# Altium PCB mdap3.PcbDoc
Units mil, origin at the board's own origin, x right, y up, seen from the top; angles counter-clockwise.
Board outline 6000 x 4000 mil, 2 copper layers (Top Layer, Bottom Layer); 145 components, 123 nets, 451 pads, 89 vias.
Unrouted connection lines stored in the file: 51.
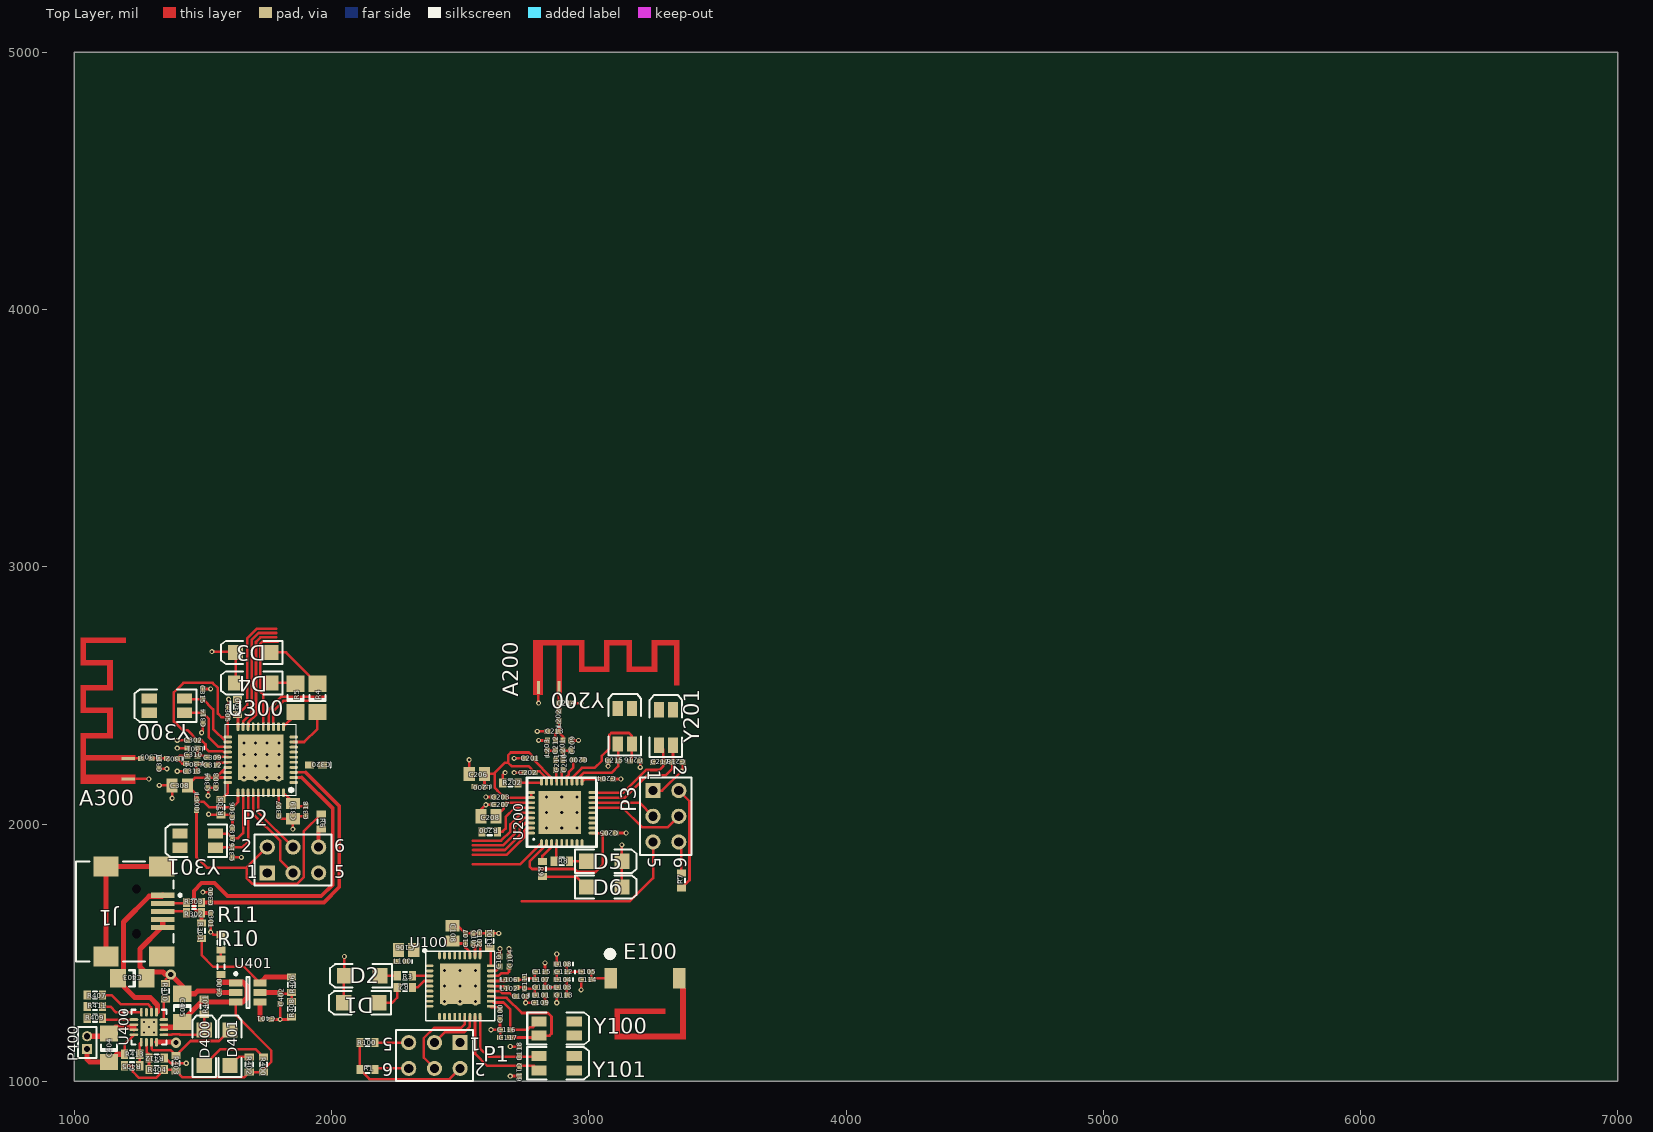
[diagram p0: Top Layer view]
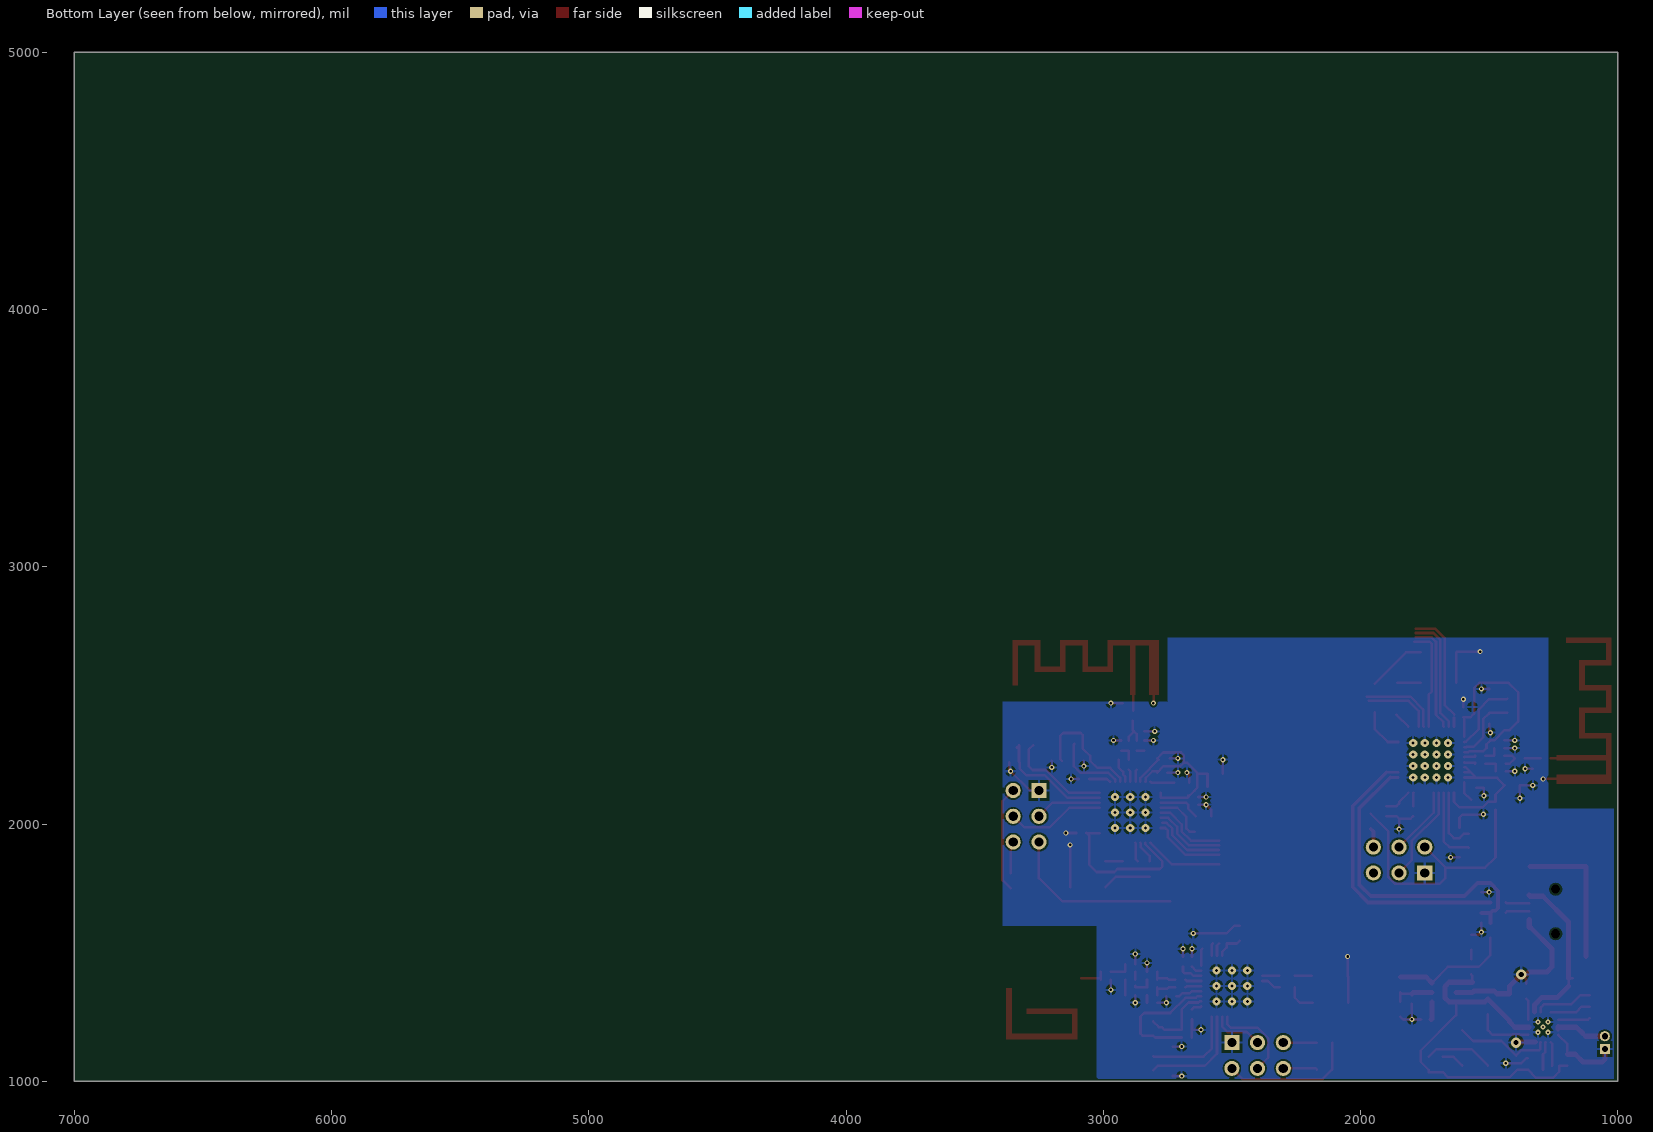
[diagram p1: Bottom Layer view, seen from below]

## Layer stack, top to bottom
Top Solder: solder mask 0.4, Solder Resist, Dk 3.5
Top Layer: signal copper 1.4
Dielectric1: dielectric 12.6, FR-4, Dk 4.8
Bottom Layer: signal copper 1.4
Bottom Solder: solder mask 0.4, Solder Resist, Dk 3.5

## Board outline
1000,1000 7000,1000 7000,5000 1000,5000

## Design rules (kind name [scope] priority, off if disabled: settings)
Clearance [All] p1: gap=7
ComponentClearance [All] p1: gap=0 collisioncheckmode=3 verticalgap=10 showdistances=FALSE
DiffPairsRouting [All] p1: maxlimit=10 minlimit=10 mostfreqgap=10 toplayer_minwidth=10 toplayer_maxwidth=15 toplayer_prefwidth=15 bottomlayer_minwidth=10 bottomlayer_maxwidth=15 bottomlayer_prefwidth=15 maxuncoupledlength=500
PolygonConnect [All] p1: connectstyle=Relief reliefconductorwidth=10 reliefentries=4 polygonreliefangle="90 Angle" airgapwidth=10
RoomDefinition U_cc2510 [InComponentClass('U_cc2510')] p1: confinementstyle=ConfineIn formatcopy=TRUE lockcomponents=FALSE outline 2475,2735 2475,1695 3400,1695 3400,2735
RoomDefinition U_cc1110 [InComponentClass('U_cc1110')] p2: confinementstyle=ConfineIn formatcopy=TRUE lockcomponents=FALSE outline 1945.31,980 3407.68,980 3407.68,1705 1945.31,1705
RoomDefinition U_CC2540 [InComponentClass('U_CC2540')] p3: confinementstyle=ConfineIn formatcopy=TRUE lockcomponents=FALSE outline 1015,1865 2135,1865 2135,2743.78 1015,2743.78
RoomDefinition U_Alim [InComponentClass('U_Alim')] p4: confinementstyle=ConfineIn formatcopy=TRUE lockcomponents=FALSE outline 1005,1865.18 1005,1010 1920.08,1010 1920.08,1865.18
RoomDefinition TOP [InComponentClass('TOP')] p5: confinementstyle=ConfineIn formatcopy=TRUE lockcomponents=FALSE outline 990,1010 3415,1010 3415,2745 990,2745
RoutingVias [All] p1: holewidth=10 width=20 viastyle="Through Hole" minholewidth=7 minwidth=18 maxholewidth=28 maxwidth=50
SolderMaskExpansion [All] p1: expansion=4
UnpouredPolygon [All] p1: allowunpoured=FALSE
Width [All] p1: maxlimit=50 minlimit=10 preferedwidth=10
27 further rules are at their usual default settings.

## Classes and differential pairs
component class U_CC2540: A300 C300 C301 C302 C303 C304 C305 C306 C307 C308 C309 C310 C311 C312 C313 C314 C315 C316 C317 C318 C319 C320 L300 L301 L302 L303 L304 R300 R301 R302 R303 R305 U300 Y300 Y301
component class U_cc2510: A200 C200 C201 C202 C203 C204 C205 C206 C207 C208 C209 C210 C211 C212 C213 C214 C215 C216 C217 C218 L200 L201 L202 L203 R200 R202 U200 Y200 Y201
component class U_cc1110: C100 C101 C102 C103 C104 C105 C106 C107 C108 C109 C110 C111 C112 C113 C114 C115 C116 C117 C118 C119 E100 L100 L101 L102 L103 L104 L105 L106 L107 L108 R100 R101 U100 Y100 Y101
component class U_Alim: C400 C401 C402 C403 C404 C405 D400 D401 P400 R400 R401 R402 R403 R404 R405 R406 R407 R408 R409 R410 R411 R412 R413 U400 U401
component class TOP: D1 D2 D3 D4 D5 D6 J1 P1 P2 P3 R1 R2 R3 R4 R5 R6 R7 R8 R9 R10 R11
differential pair D: +D_P -D_N

## Components (designator, comment, footprint, x,y, rotation, side; value= is the part's Value field where it differs from the comment)
A200 "Antenna_IIFA_1" antenna_IIFA_1 2757.39,2416.2 r270 top
A300 "Antenna_IIFA_1" antenna_IIFA_1 1323.8,2129.17 r0 top
C100 "Cap" 0402#1 2655,1260 r90 top
C101 "Cap" 0402#1 2655,1465 r270 top
C102 "Cap" 0402#1 2575,1555 r270 top
C103 "Cap" 0402#1 2735,1330 r180 top
C104 "Cap" 0402#1 2690,1465 r270 top
C105 "Cap" 0402#1 2550,1555 r270 top
C106 "Cap" C0805 2290,1510 r0 top
C107 "Cap" 0402#1 2520,1555 r90 top
C108 "Cap" C0805 2470,1575 r90 top
C109 "Cap" 0402#1 2810.31,1305 r0 top
C110 "Cap" 0402#1 2810.31,1365 r180 top
C111 "Cap" 0402#1 2750.31,1380 r270 top
C112 "Cap" 0402#1 2895.31,1425 r180 top
C113 "Cap" 0402#1 2895,1335 r0 top
C114 "Cap" 0402#1 2990,1395 r180 top
C115 "Cap" 0402#1 2810.31,1425 r180 top
C116 "Cap" 0402#1 2675,1200 r0 top
C117 "Cap" 0402#1 2675,1170 r0 top
C118 "Cap" 0402#1 2730,1115 r270 top
C119 "Cap" 0402#1 2730,1040 r90 top
C200 "Cap" 0402#1 2960,2250 r180 top
C201 "Cap" 0402#1 2770,2255 r0 top
C202 "Cap" 0402#1 2770,2200 r0 top
C203 "Cap" 0402#1 2650,2105 r0 top
C204 "Cap" 0402#1 3075,2175 r180 top
C205 "Cap" 0402#1 3085,1965 r180 top
C206 "Cap" C0805 2565,2195 r0 top
C207 "Cap" 0402#1 2650,2075 r180 top
C208 "Cap" C0805 2610,2030 r180 top
C209 "Cap" 0402#1 2930,2305 r270 top
C210 "Cap" 0402#1 2900,2230 r270 top
C211 "Cap" 0402#1 2870,2230 r270 top
C212 "Cap" 0402#1 2870,2305 r270 top
C213 "Cap" 0402#1 2860,2360 r0 top
C214 "Cap" 0402#1 2905,2470 r180 top
C215 "Cap" 0402#1 3095,2245 r0 top
C216 "Cap" 0402#1 3180,2245 r180 top
C217 "Cap" 0402#1 3270,2240 r0 top
C218 "Cap" 0402#1 3345,2240 r180 top
C300 "Cap" 0402#1 1530,1715 r90 top
C301 "Cap" 0402#1 1530,1635 r270 top
C302 "Cap" 0402#1 1460,2325 r0 top
C303 "Cap" 0402#1 1550,2160 r90 top
C304 "Cap" 0402#1 1520,2160 r90 top
C305 "Cap" 0402#1 1600,2435 r270 top
C306 "Cap" 0402#1 1615,2045 r90 top
C307 "Cap" 0402#1 1795,2050 r90 top
C308 "Cap" C0805 1410,2150 r0 top
C309 "Cap" 0402#1 1535,2260 r0 top
C310 "Cap" 0402#1 1460,2265 r0 top
C311 "Cap" 0402#1 1330,2235 r90 top
C312 "Cap" 0402#1 1535,2230 r0 top
C313 "Cap" 0402#1 1455,2205 r0 top
C314 "Cap" 0402#1 1500,2410 r90 top
C315 "Cap" 0402#1 1500,2505 r270 top
C316 "Cap" 0402#1 1615,1890 r90 top
C317 "Cap" 0402#1 1615,1965 r270 top
C318 "Cap" 0402#1 1900,2050 r90 top
C319 "Cap" C0805 1850,2050 r90 top
C320 "Cap" 0402#2 1940,2230 r180 top
C400 "Cap" 0402#1 1565,1365 r90 top
C401 "Cap" 0402#1 1745,1240 r180 top
C402 "Cap" 0402#1 1800,1320 r90 top
C403 "Cap" 1206 1225,1400 r180 top
C404 "Cap" 1206 1135,1130 r90 top
C405 "Cap" 1206 1420,1285 r270 top
D1 "LED2" 3.2X1.6X1.1 2116.1,1305 r180 top
D2 "LED2" 3.2X1.6X1.1 2120,1410 r180 top
D3 "LED2" 3.2X1.6X1.1 1696.1,2666.85 r180 top
D4 "LED2" 3.2X1.6X1.1 1696.1,2548.43 r180 top
D5 "LED2" 3.2X1.6X1.1 3060,1855 r0 top
D6 "LED2" 3.2X1.6X1.1 3060,1755 r0 top
D400 "LED2" 3.2X1.6X1.1 1505,1130 r90 top
D401 "LED2" 3.2X1.6X1.1 1605,1130 r90 top
E100 "Antenna Chip" Johanson_0868AT43A0020 3145.31,1470 r0 top
J1 "440247-1" 440247 1035,1660 r180 top
L100 "Inductor" 0402-A 2270,1465 r180 top
L101 "Inductor" 0402-A 2810.31,1335 r0 top
L102 "Inductor" 0402-A 2700,1365 r0 top
L103 "Inductor" 0402-A 2895.31,1365 r0 top
L104 "Inductor" 0402-A 2895.31,1395 r180 top
L105 "Inductor" 0402-A 2990,1425 r0 top
L106 "Inductor" 0402-A 2700,1395 r0 top
L107 "Inductor" 0402-A 2810.31,1395 r0 top
L108 "Inductor" 0402-A 2895,1455 r180 top
L200 "Inductor" 0402-A 2575,2145 r180 top
L201 "Inductor" 0402-A 2900,2305 r90 top
L202 "Inductor" 0402-A 2885,2420 r90 top
L203 "Inductor" 0402-A 2840,2305 r90 top
L300 "Inductor" 0402-A 1475,2075 r270 top
L301 "Inductor" 0402-A 1460,2295 r180 top
L302 "Inductor" 0402-A 1380,2255 r180 top
L303 "Inductor" 0402-A 1280,2255 r180 top
L304 "Inductor" 0402-A 1455,2235 r180 top
P1 "Header 3X2" HDR2X3 2500,1150 r180 top
P2 "Header 3X2" HDR2X3 1750,1810 r0 top
P3 "Header 3X2" HDR2X3 3250,2130 r270 top
P400 "Battery" MHDR1X2 1050,1125 r90 top
R1 "Res3" J1-0603 2140,1045 r0 top
R2 "Res3" J1-0603 2285,1365 r180 top
R3 "Res3" J1-0603 2285,1410 r180 top
R4 "Res3" 1206 1945,2490 r90 top
R5 "Res3" 1206 1860,2490 r90 top
R6 "Res3" J1-0603 1960,2010 r270 top
R7 "Res3" J1-0603 3360,1780 r90 top
R8 "Res3" J1-0603 2895,1855 r0 top
R9 "Res3" J1-0603 2820,1825 r270 top
R10 "Res3" J1-0603 1570,1445 r270 top
R11 "Res3" J1-0603 1570,1540 r270 top
R100 "Res3" J1-0603 2140,1150 r180 top
R101 "Res3" J1-0603 2615,1545 r270 top
R200 "Res3" J1-0603 2615,1970 r180 top
R202 "Res3" J1-0603 2695,2160 r0 top
R300 "Res3" J1-0603 1635,2455 r90 top
R301 "Res3" J1-0603 1495,1585 r270 top
R302 "Res3" J1-0603 1465,1655 r0 top
R303 "Res3" J1-0603 1465,1695 r0 top
R305 "Res3" J1-0603 1570,2065 r90 top
R400 "Res3" J1-0603 1735,1065 r270 top
R401 "Res3" J1-0603 1505,1290 r90 top
R402 "Res3" J1-0603 1680,1065 r270 top
R403 "Res3" J1-0603 1395,1070 r270 top
R404 "Res3" J1-0603 1320,1045 r0 top
R405 "Res3" J1-0603 1225,1060 r180 top
R406 "Res3" J1-0603 1845,1375 r90 top
R407 "Res3" J1-0603 1080,1335 r0 top
R408 "Res3" J1-0603 1845,1280 r90 top
R409 "Res3" J1-0603 1080,1245 r0 top
R410 "Res3" J1-0603 1355,1350 r270 top
R411 "Res3" J1-0603 1080,1290 r0 top
R412 "Res3" J1-0603 1320,1090 r180 top
R413 "Res3" J1-0603 1225,1105 r0 top
U100 "CC1110" "QLP36_4_4 (Reflow)" 2500,1370 r0 top
U200 "CC2510" "QLP36_4_4 norteam silk (Reflow)" 2895,2045 r90 top
U300 "CC2540" "QFN40_RHA (DATASHEET)" 1725,2250 r180 top
U400 "BQ24232RGTR" RGT16-1700X1700TP 1290,1210 r0 top
U401 "TPS79301" SOT26A-6M 1675,1345 r0 top
Y100 "26M000" 3.2X2.7X1.1A 2875,1205 r0 top
Y101 "32K768" 3.2X2.7X1.1A 2875,1070 r0 top
Y200 "26M000" 3.2X2.7X1.1A 3140,2380 r90 top
Y201 "32K768" 3.2X2.7X1.1A 3300,2375 r90 top
Y300 "32M000" 3.2X2.7X1.1A 1360,2460 r180 top
Y301 "32K768" 3.2X2.7X1.1A 1480,1935 r180 top

## Footprints (in the part's own frame and the unit in brackets; to place one, negate y for a bottom-side part, rotate by r counter-clockwise, add the part's x,y. Pads: shape width x height; smd on the part's side, far side on the other; paste and mask are expansions set on the pad)
3.2X1.6X1.1 [mm] "SMT LED; 2 Flat Leads"
  rect 1.5x1.5 smd: 1(-1.75,0) 2(1.75,0)
  silkscreen extent -2.9,-1.15 3.2,1.15
3.2X2.7X1.1A [mm] "SM LED, Bi-Colour; 4 Flat Leads; Body 3.2 x 2.7 x 1.1 mm (LxWxH)"
  rect 1.5x1 smd: 1(-1.75,0.7) 2(-1.75,-0.7) 3(1.75,0.7) 4(1.75,-0.7)
  silkscreen extent -2.9,-1.6 3.2,1.6
0402#1 [mm] "Chip Capacitor, Body 1.0x0.5mm, IPC High Density"
  rect 0.6x0.5 smd: 1(-0.5,0) 2(0.5,0)
  body extent -0.55,-0.3 0.55,0.3, height 1.3
0402#2 [mm] "Chip Capacitor; Body 1.0 x 0.5 mm (LxW typ)"
  rect 0.9x0.7 smd: 1(-0.65,0) 2(0.65,0)
  silkscreen extent -1.4,-0.25 -1.4,0.25
0402-A [mm] "Chip Inductor, Body 1.0x0.5mm, IPC High Density"
  rect 0.6x0.5 smd: 1(-0.5,0) 2(0.5,0)
  silkscreen extent -1.1,-0.15 -1.1,0.15, body extent -0.55,-0.3 0.55,0.3, height 0.55
1206 [mm] "Chip Capacitor; Body 3.2 x 1.6 mm (LxW typ)"
  rect 1.6x1.8 smd: 1(-1.4,0) 2(1.4,0)
  silkscreen extent -0.3,-0.8 0.3,0.8
440247 [mm] "Connector; USB2.0, Type B, SM; 5 Position; Right Angle"
  rect 2.3x0.5 smd: 1(-7.85,-1.6) 2(-7.85,-0.8) 3(-7.85,0) 4(-7.85,0.8) 5(-7.85,1.6)
  rect 2.5x2 smd: 6(-7.75,4.45) 7(-2.25,4.45) 8(-7.75,-4.45) 9(-2.25,-4.45)
  round 0.6 hole 0.9 unplated: MH1(-5.25,2.2) MH2(-5.25,-2.2)
  silkscreen extent -9.68,-4.95 0.7,4.95
antenna_IIFA_1 [mm]
  rect 1.3x0.3 smd paste-0.3 mask-0.3: 1(-2.899,3.203) 2(-2.899,1.183)
  Top Layer region: -7.589,0.703 -7.089,0.703 -7.089,5.703 -7.589,5.703
  Top Layer region: -7.589,3.003 -2.199,3.003 -2.199,3.503 -7.589,3.503
  Top Layer region: -7.589,15.103 -3.149,15.103 -3.149,14.603 -7.589,14.603
  Top Layer region: -7.589,0.703 -2.199,0.703 -2.199,1.603 -7.589,1.603
  Top Layer region: -4.449,8.203 -7.589,8.203 -7.589,7.703 -4.449,7.703
  Top Layer region: -7.589,12.403 -7.089,12.403 -7.089,15.103 -7.589,15.103
  Top Layer region: -4.449,12.903 -7.589,12.903 -7.589,12.403 -4.449,12.403
  Top Layer region: -4.949,9.903 -4.449,9.903 -4.449,12.903 -4.949,12.903
  Top Layer region: -4.449,5.203 -7.589,5.203 -7.589,5.703 -4.449,5.703
  Top Layer region: -4.949,5.203 -4.449,5.203 -4.449,8.203 -4.949,8.203
  Top Layer region: -7.589,7.703 -7.089,7.703 -7.089,10.403 -7.589,10.403
  Top Layer region: -7.589,10.403 -4.449,10.403 -4.449,9.903 -7.589,9.903
C0805 [mm] "Chip Capacitor, Body 2.0x1.3mm, IPC High Density"
  rect 1.1x1.4 smd: 1(-0.75,0) 2(0.75,0)
  body extent -1.1,-0.72 1.1,0.72, height 1.4
HDR2X3 [mm] "Connector; Header; 3x2 Position"
  rect 1.5x1.5 hole 0.9: 1(0,0)
  round 1.5 hole 0.9: 2(0,2.54) 3(2.54,0) 4(2.54,2.54) 5(5.08,0) 6(5.08,2.54)
  silkscreen extent -1.27,-1.27 6.35,3.81
J1-0603 [mm] "Chip Resistor, Body 1.6x0.8mm, IPC High Density"
  rect 0.7x0.9 smd: 1(-0.75,0) 2(0.75,0)
  silkscreen extent -0.2,-0.35 0.2,0.35, body extent -0.85,-0.48 0.85,0.48, height 0.9
Johanson_0868AT43A0020 [mm]
  rect 1.25x2 smd paste+0 mask+0.1: 1(-1.51,-1.77) 2(5.24,-1.77)
  Top Layer region: -0.635,-7.27 5.365,-7.27 5.365,-7.77 -0.635,-7.77
  Top Layer region: 5.365,-2.77 5.865,-2.77 5.865,-7.77 5.365,-7.77
  Top Layer region: -1.135,-4.77 -0.635,-4.77 -0.635,-7.77 -1.135,-7.77
  Top Layer region: -0.635,-4.77 3.865,-4.77 3.865,-5.27 -0.635,-5.27
  silkscreen extent -2.2,0.02 -0.97,1.24
MHDR1X2 [mm] "Connector; Header; 2 Position"
  rect 1x1 hole 0.6: 1(0,0)
  round 1 hole 0.6: 2(1.27,0)
  silkscreen extent -0.9,-0.9 2.17,0.9
"QFN40_RHA (DATASHEET)" [mm]
  oval 0.85x0.28 smd paste+0 mask+0.14: 1(-3.26,2.255) 2(-3.26,1.755) 3(-3.26,1.255) 4(-3.26,0.755) 5(-3.26,0.255) 6(-3.26,-0.245) 7(-3.26,-0.745) 8(-3.26,-1.245) 9(-3.26,-1.745) 10(-3.26,-2.245) 21(3.26,-2.245) 22(3.26,-1.745) 23(3.26,-1.245) 24(3.26,-0.745) 25(3.26,-0.245) 26(3.26,0.255) 27(3.26,0.755) 28(3.26,1.255) 29(3.26,1.755) 30(3.26,2.255)
  oval 0.28x0.85 smd paste+0 mask+0.14: 11(-2.25,-3.255) 12(-1.75,-3.255) 13(-1.25,-3.255) 14(-0.75,-3.255) 15(-0.25,-3.255) 16(0.25,-3.255) 17(0.75,-3.255) 18(1.25,-3.255) 19(1.75,-3.255) 20(2.25,-3.255) 31(2.25,3.265) 32(1.75,3.265) 33(1.25,3.265) 34(0.75,3.265) 35(0.25,3.265) 36(-0.25,3.265) 37(-0.75,3.265) 38(-1.25,3.265) 39(-1.75,3.265) 40(-2.25,3.265)
  rect 4.472x4.472 smd paste+0 mask+0.14: 41(0,-0.254)
  silkscreen extent -3.5,-3.5 3.5,3.5, body extent -3.05,-3.05 3.05,3.05, height 0.97
"QLP36_4_4 (Reflow)" [mil]
  oval 29x11 smd paste-2 mask+4: 1(-118.5,78.74) 2(-118.5,59.06) 3(-118.5,39.37) 4(-118.5,19.68) 5(-118.5,0) 6(-118.5,-19.68) 7(-118.5,-39.37) 8(-118.5,-59.06) 9(-118.5,-78.74) 19(118.5,-78.74) 20(118.5,-59.06) 21(118.5,-39.37) 22(118.5,-19.68) 23(118.5,0) 24(118.5,19.68) 25(118.5,39.37) 26(118.5,59.06) 27(118.5,78.74)
  oval 11x29 smd paste-2 mask+4: 10(-80.32,-118.5) 11(-60.63,-118.5) 12(-40.94,-118.5) 13(-21.26,-118.5) 14(-1.57,-118.5) 15(18.11,-118.5) 16(37.8,-118.5) 17(57.48,-118.5) 18(77.17,-118.5) 28(77.17,118.5) 29(57.48,118.5) 30(37.8,118.5) 31(18.11,118.5) 32(-1.57,118.5) 33(-21.26,118.5) 34(-40.94,118.5) 35(-60.63,118.5) 36(-80.32,118.5)
  rect 157.48x157.48 smd paste-2 mask+4: 37(-0.32,8.5)
  silkscreen extent -148,-135 135,148, body extent -120,-120 120,120, height 38
"QLP36_4_4 norteam silk (Reflow)" [mil]
  oval 29x11 smd paste+0.1 mask+4: 1(-118.5,78.74) 2(-118.5,59.06) 3(-118.5,39.37) 4(-118.5,19.68) 5(-118.5,0) 6(-118.5,-19.68) 7(-118.5,-39.37) 8(-118.5,-59.06) 9(-118.5,-78.74) 19(118.5,-78.74) 20(118.5,-59.06) 21(118.5,-39.37) 22(118.5,-19.68) 23(118.5,0) 24(118.5,19.68) 25(118.5,39.37) 26(118.5,59.06) 27(118.5,78.74)
  oval 11x29 smd paste+0.1 mask+4: 10(-80.32,-118.5) 11(-60.63,-118.5) 12(-40.94,-118.5) 13(-21.26,-118.5) 14(-1.57,-118.5) 15(18.11,-118.5) 16(37.8,-118.5) 17(57.48,-118.5) 18(77.17,-118.5) 28(77.17,118.5) 29(57.48,118.5) 30(37.8,118.5) 31(18.11,118.5) 32(-1.57,118.5) 33(-21.26,118.5) 34(-40.94,118.5) 35(-60.63,118.5) 36(-80.32,118.5)
  rect 165.35x165.35 smd paste+0 mask+0: 37(-0.32,8.5)
  silkscreen extent -133,-135 135,135, body extent -120,-120 120,120, height 38
RGT16-1700X1700TP [mm] "QFN, 16-Leads, Body 3x3mm, Pitch 0.5mm, Thermal Pad 1.7x1.7mm, TI Recommended"
  oval 0.85x0.28 smd paste-0.025 mask+0.07: 1(-1.475,0.75) 2(-1.475,0.25) 3(-1.475,-0.25) 4(-1.475,-0.75) 9(1.475,-0.75) 10(1.475,-0.25) 11(1.475,0.25) 12(1.475,0.75)
  oval 0.28x0.85 smd paste-0.025 mask+0.07: 5(-0.75,-1.475) 6(-0.25,-1.475) 7(0.25,-1.475) 8(0.75,-1.475) 13(0.75,1.475) 14(0.25,1.475) 15(-0.25,1.475) 16(-0.75,1.475)
  rect 1.7x1.7 smd paste-0.85 mask+0.07: 17(0,0)
  silkscreen extent -2.5,-1.73 1.73,1.73, body extent -1.57,-1.57 1.58,1.58, height 1
SOT26A-6M [mm]
  rect 1.3x0.7 smd: 1(-1.2,0.95) 2(-1.2,0) 3(-1.2,-0.95) 4(1.2,-0.95) 5(1.2,0) 6(1.2,0.95)
  silkscreen extent -1.32,-1.55 0.15,1.97, body extent -0.9,-1.55 0.9,1.55

## Part data
A200 A300: "Antenna single ended IIFA, 2450 MHz"
C100 C101 C102 C103 C104 C105 C106 C107 C108 C109 C110 C111 C112 C113 C114 C115 C116 C117 C118 C119 C200 C201 C202 C203 C204 C205 C206 C207 C208 C209 C210 C211 C212 C213 C214 C215 C216 C217 C218 C300 C301 C302 C303 C304 C305 C306 C307 C308 C309 C310 C311 C312 C313 C314 C315 C316 C317 C318 C319 C320 C400 C401 C402 C403 C404 C405: "Capacitor"
D1 D2 D3 D4 D5 D6 D400 D401: "Typical RED, GREEN, YELLOW, AMBER GaAs LED"
E100: library part Antenna, "Generic Antenna"
J1: "USB 2.0, Right Angle, SMT, B Type, Receptacle, 5 Position, Black"
P1 P2 P3: "Header, 3-Pin, Dual row"
P400: library part "Header 2", "Header, 2-Pin"
R1 R2 R3 R4 R5 R6 R7 R8 R9 R10 R11 R100 R101 R200 R202 R300 R301 R302 R303 R305 R400 R401 R402 R403 R404 R405 R406 R407 R408 R409 R410 R411 R412 R413: "Resistor"
U100 U200: "Single chip transceiver"
U300: "Single chip BLE"
U400: "USB Friendly 0.5 A Li+ Charger with Dynamic Power Management, 10.5 V OVP, 4.3 V, -40 to 85 degC, 16-pin QFN (RGT), Green (RoHS & no Sb/Br)"
Y100 Y101 Y200 Y201 Y300 Y301: library part XTAL, "Crystal Oscillator"

## Via types
v1: diameter 20, hole 10, Top Layer to Bottom Layer, 48 vias
v2: diameter 31.5, hole 11.81, Top Layer to Bottom Layer, 34 vias
v3: diameter 19.68, hole 7.87, Top Layer to Bottom Layer, tented top, 5 vias
v4: diameter 40, hole 20, Top Layer to Bottom Layer, 2 vias

## Nets (pads, with @x,y where several pads share a name; then routed paths per layer and width w, separated by ;. In a path a pad name is that pad's centre, name@x,y a point inside that pad or via, vN(x,y) a via of type N, cw(c..) or ccw(c..) an arc to the next point about the centre after c; other vN are vias at no path point)
AVDD_CC1110: C100.2 C101.2 C102.2 C103.2 C104.2 C105.2 C106.2 L100.1 U100.2 U100.10 U100.19 U100.22 U100.25 U100.26 U100.28 U100.29 | length 384.7
  Top Layer w10: C105.2 2557.8,1527.52 U100.29@2557.8,1488.5 ; C102.2 2577.48,1532.83 U100.28@2577.48,1488.5 ; U100.19@2618.82,1291.26 2621.92,1288.16 2646.53,1288.16 C100.2 ; U100.22@2618.82,1350.31 2654.96,1350.31 2663.12,1342.16 2692.84,1342.16 2705,1330 C103.2 ; U100.25@2618.82,1409.37 2649.37,1409.37 2660,1420 2685,1420 2690,1425 C104.2 ; U100.26@2618.82,1429.06 2638.74,1429.06 C101.2
AVDD_CC2510: C200.2 C201.2 C202.2 C203.2 C204.2 C205.2 C206.2 L200.1 U200.2 U200.10 U200.19 U200.22 U200.25 U200.26 U200.28 U200.29 | length 1639.1
  Top Layer w10: L200.1 2594.68,2194.84 C206.2 2630,2195 2635,2200 ; 2645.24,2130 2635,2140.24 2635,2200 ; 2646.07,2129.28 2669.69,2105.67 C203.2 2672.2,2102.48 U200.29 U200.28 ; C203.2@2669.69,2110 C203.2@2672.19,2107.5 ; C201.2@2784.69,2250 2855.63,2179.06 U200.25 ; C202.2 2789.69,2200.67 2765.35,2225 2700,2225 2687,2238 ; C202.2@2789.69,2205 2809.3,2205 2834.76,2179.54 2834.76,2164.69 U200.26 ; C201.2 2789.69,2255.67 2767.35,2278 2697.47,2278 2687,2267.53 2687,2238 ; U200.2 2835.94,1920.94 2770,1855 2770,1835 2780,1825 2945.08,1825 2956.6,1813.47 3025.6,1813.47 3055,1842.87 3055,1954.68 C205.2@3065,1964.68 ; U200.22 2914.68,2184.96 2922.84,2193.12 2922.84,2202.84 2940.31,2220.31 C200.2 ; U200.19 2985.24,2175 3054.68,2175 C204.2@3055,2174.69 ; U200.10 C205.2@3065,1964.68 ; C205.2 C205.2@3065,1964.68 ; 2635,2200 2673,2238 2687,2238
AVDD_CC2540: C302.2 C303.2 C304.2 C305.2 C306.2 C307.2 C308.2 C320.2 L300.1 U300.4 U300.10 U300.21 U300.24 U300.27 U300.28 U300.29 U300.31 U300.39 | length 1403.3
  Top Layer w10: U300.29 C303.2@1551.22,2180.91 ; U300.28 1570.91,2200.59 ; U300.27 1590.59,2220.28 1570.91,2200.59 ; U300.24 1580.39,2279.33 1576.72,2283 1522,2283 1510,2295 1510,2310 1495,2325 C302.2 1439.69,2365 1420,2365 1387.37,2397.63 1387.37,2512.21 1423.65,2548.5 1537.62,2548.5 1557.84,2528.27 1557.84,2428.75 1571.28,2415.31 C305.2 1596.65,2411.97 U300.21 ; U300.31 1636.42,2086.1 C306.2 1525.31,2064.69 1503,2087 1475,2087 L300.1 1475,2114.53 C308.2 1469.21,2179.69 C304.2 C303.2 C303.2@1551.22,2180.91 ; U300.39 1795,2120.35 C307.2 ; C303.2@1551.22,2180.91 1570.91,2200.59
CHARGING: D400.2 R401.1 U300.14 U400.9 | length 535.6
  Top Layer w10: U400.9 1378.8,1180.47 1381.33,1183 1408.67,1183 1411.2,1180.47 1486.57,1180.47 D400.2 R401.1 ; U300.14 1756.7,2380.32 1756.7,2445.74 1806.34,2495.38 1975,2495.38
D_N: C300.1 R303.2 U300.3 | length 1107.4
  Top Layer w10: U300.3 1852.64,2200.59 1852.8,2200.75 1899.61,2200.75
  Top Layer w15: R303.2@1494.84,1695.32 C300.1 ; C300.1@1530.31,1695 1970.36,1695 2030,1754.64 2030,2070.36 1899.61,2200.75
D_P: C301.1 R301.1 R302.2 U300.2 | length 1269.3
  Top Layer w10: U300.2 1852.64,2180.91 1852.8,2180.75 1884.25,2180.75
  Top Layer w15: R302.2 1486.74,1662.78 1474.74,1662.78 1465,1672.53 1465,1740 1495,1770 1545,1770 1595,1720 1960,1720 2005,1765 2005,2060 1884.25,2180.75 ; R301.1@1494.84,1614.68 1494.84,1654.68 C301.1
DC_1110: P1.3 U100.16 | length 202.5
  Top Layer w10: P1.3 2441.53,1191.53 2516.53,1191.53 2537.8,1212.8 U100.16
DC_2510: P3.3 U200.16 | length 258.4
  Top Layer w10: U200.16 3197.2,2082.8 P3.3
DC_2540: P2.3 U300.34 | length 375.5
  Top Layer w10: U300.34 1695.47,2039.53 1800,1935 1800,1860 P2.3
DD_1110: P1.4 U100.15 | length 346.4
  Top Layer w10: P1.4 2358.47,1091.53 2358.47,1167.2 2399.8,1208.53 2505,1208.53 2518.11,1221.64 U100.15
DD_2510: P3.4 U200.15 | length 385.4
  Top Layer w10: U200.15 3131.83,2063.11 3207.47,1987.47 3307.47,1987.47 P3.4
DD_2540: P2.4 U300.35 | length 267.3
  Top Layer w10: U300.35 1715.16,2044.84 P2.4
DN: J1.2 R303.1 | length 92.9
  Top Layer w10: J1.2 1431.97,1691.5 R303.1
DP: J1.3 R302.1 | length 93.5
  Top Layer w10: J1.3 1430.47,1660 R302.1
GND: A200.2 A300.2 C100.1 C101.1 C102.1 C103.1 C104.1 C105.1 C106.1 C107.2 C108.2 C109.1 C113.1 C114.2 C115.1 C116.1 C117.1 C118.1 C119.1 C200.1 C201.1 C202.1 C203.1 C204.1 C205.1 C206.1 C207.2 C208.2 C209.1 C213.1 C214.1 C215.1 C216.1 C217.1 C218.1 C300.2 C301.2 C302.1 C303.1 C304.1 C305.1 C306.1 C307.1 C308.1 C311.1 C313.1 C314.1 C315.1 C316.1 C317.1 C318.1 C319.1 C320.1 C400.1 C401.1 C402.1 C403.1 C404.1 C405.1 D1.2 D2.2 D3.2 D4.2 D5.2 D6.2 J1.4 J1.5 L108.2 L203.2 L301.2 P1.1 P2.1 P3.1 P400.1 R11.1 R101.1 R202.1 R305.1 R407.1 R408.1 R409.1 R410.1 R411.1 R412.1 R413.1 U100.37 U200.37 U300.1 U300.41 U400.4 U400.8 U400.17 U401.2 | length 4167.8
  Top Layer w10: R413.1 1195.47,1144.02 U400.4 ; A300.2 1289.25,2175.75 v1(1290,2175) ; v1(1330,2150) C308.1 1380.47,2100.47 v1(1380,2100) ; C311.1 1359.68,2215.32 v1(1360,2215) ; R412.1 1354.41,1090 1374.41,1070 v1(1435,1070) ; R410.1 1355,1395 v4(1375,1415) ; v1(1400,2205) C313.1 ; v1(1400,2295) 1410,2295 L301.2 ; v1(1400,2325) C302.1 ; v1(1495,2355) 1500,2355 C314.1 ; v1(1500,1735) 1500.31,1734.69 C300.2 ; C315.1 1529.68,2524.68 v1(1530,2525) ; v1(1520,2110) C304.1 C303.1 ; v1(1522.26,2037.74) 1524.53,2035.47 R305.1 1605,2035.47 C306.1@1615.16,2025.32 ; C301.2 v1(1530,1580) 1540.47,1569.53 R11.1 ; v1(1535,2670) 1624.06,2670 D3.2 D4.2 ; C305.1 v1(1600,2485) ; C316.1 v1(1649.68,1870.32) v1@1650,1870 ; C317.1 C306.1 ; C401.1 v1@1799.61,1240 ; C307.1 1804.84,2020.47 C319.1 ; C402.1 v1(1800,1240.39) v1@1799.61,1240 ; R408.1 1834.53,1240 v1@1799.61,1240 ; v1(1850,1980) C319.1 ; C318.1 1859.84,2030.32 C319.1 ; D1.2 2047.2,1406.1 2050,1408.9 v1(2050,1485) ; C108.2 2490.16,1604.53 C107.2 2520.16,1574.53 R101.1 2649.53,1574.53 v1(2650,1575) ; v1(2535,2250) 2535.47,2249.53 C206.1 ; C208.2 2580.47,2055.47 v1(2600,2075) C207.2 ; v1(2600,2105) C203.1 ; v1(2620,1200) C116.1 ; C100.1 2655,1200.32 C116.1 ; C101.1 v1(2655,1515) ; C117.1 C116.1 ; R202.1 2665.47,2190.47 v1(2675,2200) ; C104.1 v1(2690,1515) ; v1(2695,1020) 2695.32,1020.32 C119.1 ; v1(2695,1135) 2695.32,1134.68 C118.1 ; v1(2710,2200) C202.1 ; v1@2720,2255 C201.1@2740.32,2255 ; C103.1 v1(2754.68,1305.32) 2755,1305 C109.1 ; v1(2800,2360) C213.1 ; v1(2805,2325) 2805.31,2324.69 L203.2 ; C115.1 v1(2830,1460) ; v1(2875.32,1305.32) C113.1 ; L108.2 v1(2875.31,1494.69) ; C214.1 v1(2970,2470) ; C209.1 2959.68,2324.68 v1(2960,2325) ; v1(2970.31,1355.31) C114.2 ; v1(3075,2225) 3075,2220.63 3075.32,2220.32 C215.1 ; C204.1 v1(3125,2175) ; C205.1 v1(3145,1965) ; D6.2 D5.2 v1(3128.9,1918.9) ; C216.1 3199.68,2220.32 v1(3200,2220) ; P3.1 3285,2130 v1(3360,2205) 3364.68,2209.68 C218.1
  Top Layer w20: P400.1 1050,1085 1060.12,1074.88 C404.1 1165.12,1105 R413.1 ; U400.8 1393.07,1151.93 v4(1395,1150) v4@1390,1145 ; J1.4 J1.5 1338.29,1597.01 1255,1513.72 1255,1445.12 1275.12,1425 1345,1425 1355,1415 v4(1375,1415) 1420,1370 C405.1 1468.64,1340.12 1479.83,1351.31 1559.01,1351.31 C400.1 1627.44,1345.32 U401.2
  other v1: 2710,2255
  other v2: 2440,1310 2500,1310 2560,1310 2440,1370 2500,1370 2560,1370 2440,1430 2500,1430 2560,1430 2835,1985 2895,1985 2955,1985 2835,2045 2895,2045 2955,2045 2835,2105 2895,2105 2955,2105 1660,2180 1705,2180 1750,2180 1795,2180 1660,2225 1705,2225 1750,2225 1795,2225 1660,2270 1705,2270 1750,2270 1795,2270 1660,2315 1705,2315 1750,2315 1795,2315
  other v3: 1270.32,1190.31 1309.69,1190.32 1290,1210 1270.32,1229.68 1309.69,1229.69
IRQ_C1110: U100.1 U300.19 | length 457.8
  Top Layer w10: U300.19 1656.1,2397.84 1689.47,2431.21 1689.47,2715.43 1716.42,2742.38 1785,2742.38
IRQ_C2510: U200.1 U300.18 | length 728.9
  Top Layer w10: U300.18 1677.96,2380.32 1677.96,2395.66 1706.47,2424.17 1706.47,2708.39 1723.46,2725.38 1785,2725.38 ; 2550,1844 2733.76,1844 U200.1
NetA200_1: A200.1 C214.2 L202.2 | length 89.2
  Top Layer w10: L202.2@2883.5,2441.18 A200.1
NetA300_1: A300.1 L303.2 | length 50.8
  Top Layer w10: A300.1 1209.92,2255 L303.2
NetC107_1: C107.1 C108.1 U100.30 | length 108.5
  Top Layer w10: C108.1 2480.16,1535.32 C107.1 2520,1520 2538.11,1501.89 U100.30@2538.11,1488.5
NetC109_2: C109.2 L101.2 | length 30
  Top Layer w10: C109.2 L101.2
NetC110_1: C110.1 L103.1 L107.2 | length 80.8
  Top Layer w10: L107.2 C110.1 L103.1 L103.1@2875.63,1370.16
NetC110_2: C110.2 C111.2 L101.1 L102.2 | length 104.8
  Top Layer w10: L102.2 2745.63,1365 C111.2 2785.94,1360.31 C110.2 L101.1
NetC111_1: C111.1 C115.2 L106.2 L107.1 | length 104.8
  Top Layer w10: L106.2 2745.63,1395 C111.1 2785.95,1399.68 L107.1 C115.2
NetC112_1: C112.1 L105.1 L108.1 | length 85
  Top Layer w10: C112.1@2914.68,1425.31 L108.1 ; C112.1 L105.1
NetC112_2: C112.2 L104.2 | length 30
  Top Layer w10: L104.2 C112.2
NetC113_2: C113.2 L103.2 L104.1 | length 59.7
  Top Layer w10: C113.2@2915,1335.32 L103.2 L104.1
NetC114_1: C114.1 E100.1 L105.2 | length 101.3
  Top Layer w10: C114.1 L105.2 L105.2@3010,1425.31 ; C114.1@3015,1400.31 E100.1
NetC116_2: C116.2 U100.20 Y100.1 | length 293.6
  Top Layer w10: U100.20@2618.82,1310.94 2625.3,1310.94 2630.08,1306.16 2668.57,1306.16 2694.69,1280.04 C116.2 2761.06,1200 2771.19,1210.13 2783.67,1210.13 Y100.1
NetC117_2: C117.2 U100.21 Y100.2 | length 501.8
  Top Layer w10: U100.21@2618.82,1330.63 2633.53,1330.63 2640,1324.16 2680.84,1324.16 2739.76,1265.24 2841.01,1265.24 2855,1251.26 2855,1185 2847.44,1177.44 Y100.2 2798.66,1170 C117.2
NetC118_2: C118.2 U100.18 Y101.1 | length 366.9
  Top Layer w10: U100.18@2577.48,1251.5 2577.48,1127.52 2609.69,1095.31 C118.2 2803.86,1095.31 Y101.1
NetC119_2: C119.2 U100.17 Y101.2 | length 419.4
  Top Layer w10: U100.17@2557.8,1251.5 2557.8,1107.2 2605.31,1059.69 C119.2 2788.86,1059.69 Y101.2
NetC207_1: C207.1 C208.1 U200.30 | length 167.9
  Top Layer w10: C208.1 2669.68,2060.16 C207.1 2676.84,2082.16 2776.5,2082.16 U200.30
NetC209_2: C209.2 C210.1 L201.1 | length 65.6
  Top Layer w10: C210.1 L201.1 C209.2
NetC210_2: C210.2 U200.23 | length 48.9
  Top Layer w10: U200.23 2895,2205.31 C210.2
NetC211_1: C211.1 C212.2 L203.1 | length 30
  Top Layer w10: L203.1 C212.2
NetC211_2: C211.2 U200.24 | length 47.3
  Top Layer w10: C211.2 2874.13,2206.19 U200.24@2874.13,2164.69
NetC212_1: C212.1 C213.2 L201.2 L202.1 | length 125.6
  Top Layer w10: C212.1 2870,2350.32 C213.2 ; L202.1 2885,2365.31 C213.2 ; L201.2 2900,2339.69 C213.2
NetC215_2: C215.2 U200.20 Y200.1 | length 279.1
  Top Layer w10: U200.20 2954.06,2173.42 2980.64,2200 3090,2200 3114.69,2224.69 C215.2 3114.69,2308.86 Y200.1
NetC216_2: C216.2 U200.21 Y200.2 | length 467.9
  Top Layer w10: U200.21 2934.37,2179.19 2973.18,2218 3023,2218 3050.5,2245.5 3050.5,2264.72 3079.76,2293.98 3079.76,2346.01 3087.37,2353.63 3156.37,2353.63 3167.56,2342.44 Y200.2 3167.56,2252.24 C216.2
NetC217_2: C217.2 U200.18 Y201.1 | length 407.2
  Top Layer w10: U200.18 3134.69,2122.17 3222.53,2210 3275,2210 3289.69,2224.69 C217.2 3289.69,2288.86 Y201.1
NetC218_2: C218.2 U200.17 Y201.2 | length 462.4
  Top Layer w10: U200.17 3140.46,2102.48 3227.98,2190 3300,2190 3325.31,2215.31 C218.2 3327.56,2242.24 Y201.2 Y201.2@3336.14,2297.52
NetC309_1: C309.1 C310.2 L301.1 | length 65.6
  Top Layer w10: L301.1 C310.2 C309.1@1515.32,2265
NetC309_2: C309.2 U300.25 | length 46.6
  Top Layer w10: C309.2@1554.69,2265 1554.69,2260.82 1595.48,2260.82 U300.25
NetC310_1: C310.1 L302.1 L304.2 | length 88.7
  Top Layer w10: L304.2 1419.68,2235 L302.1 1409.69,2265 C310.1
NetC311_2: C311.2 L302.2 L303.1 | length 60.6
  Top Layer w10: L303.1 L302.2
NetC312_1: C312.1 C313.2 L304.1 | length 70.6
  Top Layer w10: C313.2 L304.1 C312.1@1515.31,2235
NetC312_2: C312.2 U300.26 | length 46.2
  Top Layer w10: C312.2@1554.69,2235 1554.69,2238.79 1595.48,2238.79 U300.26
NetC314_2: C314.2 U300.23 Y300.1 | length 265.4
  Top Layer w10: Y300.1 1497.24,2432.44 C314.2 1500.67,2429.69 1522.84,2407.51 1522.84,2337.16 1559,2301 1586.16,2301 1586.16,2299.02 U300.23
NetC315_2: C315.2 U300.22 Y300.2 | length 282.5
  Top Layer w10: Y300.2 1431.14,2485.31 C315.2 1540,2445.32 1540,2416.65 1540.84,2415.81 1540.84,2368.02 1588.99,2319.87 1595.48,2319.87 U300.22
NetC316_2: C316.2 U300.33 Y301.1 | length 297.2
  Top Layer w10: 1578.9,1907.44 1581.14,1909.69 1654.69,1909.69 1675.79,1930.79 U300.33
NetC317_2: C317.2 U300.32 Y301.2 | length 249
  Top Layer w10: 1578.9,1962.56 1597.09,1962.56 1614.33,1945.31 C317.2 1636.42,1945.31 1656.1,1965 U300.32
NetC318_2: C318.2 C319.2 U300.40 | length 111.1
  Top Layer w10: U300.40 1850,2085.04 C319.2 1859.84,2069.69 C318.2
NetC401_2: C401.2 U401.4 | length 68.9
  Top Layer w20: U401.4 1722.24,1243.07 C401.2
NetC402_2: C402.2 R406.1 R408.2 U401.5 | length 163.3
  Top Layer w10: C402.2 1839.21,1339.69 R406.1 R408.2
  Top Layer w20: U401.5 1794.68,1345 C402.2
NetC404_2: C404.2 P400.2 U400.2 U400.3 | length 205.2
  Top Layer w10: C404.2@1124.88,1175 C404.2
  Top Layer w20: P400.2 C404.2@1124.88,1175 ; C404.2 1159.88,1210 1230,1210 1231.93,1211.93 U400.3@1231.93,1203.98
NetD1_1: D1.1 R2.2 | length 118.5
  Top Layer w10: D1.1 2235,1305 2255.47,1325.47 R2.2
NetD2_1: D2.1 R3.2 | length 66.6
  Top Layer w10: D2.1 R3.2
NetD3_1: D3.1 R4.2 | length 230.4
  Top Layer w10: D3.1 1823.27,2666.85 R4.2
NetD4_1: D4.1 R5.2 | length 91.7
  Top Layer w10: D4.1 R5.2@1856.69,2548.43
NetD5_1: D5.1 R8.2 | length 66.6
  Top Layer w10: R8.2 D5.1
NetD6_1: D6.1 R9.2 | length 187.9
  Top Layer w10: R9.2 2950.63,1795.47 D6.1
NetD400_1: D400.1 R400.1 | length 269.1
  Top Layer w10: D400.1 1568.9,1125 1704.53,1125 R400.1
NetD401_1: D401.1 R402.1 | length 88.8
  Top Layer w10: D401.1 1638.43,1094.53 R402.1
NetJ1_6: J1.6 J1.7 J1.8 J1.9 | length 566.9
  Top Layer w20: J1.7 J1.9 J1.8
NetL102_1: L102.1 U100.23 | length 63.6
  Top Layer w10: U100.23@2618.82,1370 2675.31,1370 L102.1
NetL106_1: L106.1 U100.24 | length 63.7
  Top Layer w10: U100.24@2618.82,1389.68 2675,1389.68 L106.1
NetP1_6: P1.6 R1.2 | length 132.5
  Top Layer w10: R1.2 2174.53,1050 P1.6
NetP2_6: P2.6 R6.2 | length 74.6
  Top Layer w15: P2.6 1950,1970.47 R6.2
NetP3_6: P3.6 R7.2 | length 124.6
  Top Layer w10: P3.6 3360,1920 R7.2
NetR2_1: R2.1 U100.4 | length 77.2
  Top Layer w10: R2.1 2335,1365 2359.68,1389.68 U100.4
NetR3_1: R3.1 U100.3 | length 66.3
  Top Layer w10: R3.1@2315.16,1409.37 U100.3
NetR4_1: R4.1 U300.9 | length 177.8
  Top Layer w10: U300.9 1893.7,2318.7 1945,2370 R4.1
NetR5_1: R5.1 U300.11 | length 65.6
  Top Layer w10: U300.11 R5.1@1860,2424.57
NetR8_1: R8.1 U200.4 | length 75.6
  Top Layer w10: R8.1 2874.13,1863.66 2874.13,1925.31 U200.4
NetR9_1: R9.1 U200.3 | length 86.7
  Top Layer w10: R9.1 2820,1876.02 2854.44,1910.46 2854.44,1925.31 U200.3
NetR101_2: R101.2 U100.27 | length 68.3
  Top Layer w10: R101.2 2618.82,1511.65 U100.27@2618.82,1448.74
NetR202_2: R202.2 U200.27 | length 93.2
  Top Layer w10: R202.2 2812.76,2160 U200.27
NetR305_2: R305.2 U300.30 | length 77.7
  Top Layer w10: R305.2 1596.65,2121.18 U300.30
NetR404_1: R404.1 R412.2 U400.6 | length 111.2
  Top Layer w10: U400.6 1281.31,1150.78 1281.31,1114.17 1290.47,1105 R404.1
NetR405_1: R405.1 R413.2 U400.5 | length 94.4
  Top Layer w10: R405.1 R413.2 1254.53,1145.98 U400.5
NetR407_2: R407.2 U400.14 | length 228.4
  Top Layer w10: R407.2 1145,1335 1180,1300 1285.63,1300 1298.67,1286.96 1298.67,1269.24 U400.14
NetR409_2: R409.2 U400.1 | length 124.7
  Top Layer w10: R409.2 1115,1239.53 U400.1
NetR410_2: R410.2 U400.12 | length 83.8
  Top Layer w10: U400.12 1348.07,1313.54 R410.2
NetR411_2: R411.2 U400.16 | length 160
  Top Layer w10: R411.2 1140,1290 1161.93,1268.07 U400.16
NetU100_5: U100.5
NetU100_6: U100.6
NetU100_7: U100.7
NetU100_8: U100.8
NetU100_9: U100.9
NetU100_11: U100.11
NetU100_12: U100.12
NetU100_13: U100.13
NetU100_14: U100.14
NetU100_36: U100.36
NetU200_5: U200.5
NetU200_6: U200.6
NetU200_7: U200.7
NetU200_8: U200.8
NetU200_9: U200.9
NetU200_11: U200.11
NetU200_12: U200.12
NetU200_13: U200.13
NetU200_14: U200.14
NetU200_36: U200.36
NetU300_6: U300.6
NetU300_12: U300.12
NetU300_16: U300.16
NetU300_17: U300.17
NetU300_36: U300.36
RST_1110: P1.5 R100.1 U100.31 | length 130.5
  Top Layer w10: R100.1 P1.5
RST_2510: P3.5 R200.1 U200.31 | length 884.7
  Top Layer w10: R200.1 2665,1970 2677,1982 2677,2027.82 2712.29,2063.11 U200.31 ; 2740,1700 3160,1700 3250,1790 P3.5
RST_2540: P2.5 R300.1 U300.20 | length 476.2
  Top Layer w10: R300.1 1672.47,2462.95 1672.47,2722.47 1709.38,2759.38 1785,2759.38 ; U300.20 R300.1@1636.42,2414.06
SENSE_VBATT: R10.1 R11.2 U300.13 | length 307.4
  Top Layer w10: R10.1 R11.2 ; U300.13 1774.21,2439.21 1813.38,2478.38 1968.38,2478.38
SPI_CK: U100.34 U200.34 U300.5 | length 278.9
  Top Layer w10: 2550,1899 2674.32,1899 2731,1955.68 2731,1981.83 2753.23,2004.06 U200.34@2770.02,2004.06
SPI_MI: U100.32 U200.32 U300.37 | length 288.1
  Top Layer w10: 2550,1935 2659.41,1935 2695,1970.59 2695,1999.07 2739.35,2043.43 U200.32
SPI_MO: U100.33 U200.33 U300.38 | length 286
  Top Layer w10: 2550,1917 2666.86,1917 2713,1963.14 2713,1989.28 2747.46,2023.74 U200.33
SPI_SS_C1110: U100.35 U300.8
SPI_SS_C2510: U200.35 U300.7 | length 285
  Top Layer w10: 2550,1880 2551,1881 2681.78,1881 2749,1948.22 2749,1974.37 2759,1984.37 U200.35
USB_PGOOD: D401.2 R403.1 U300.15 U400.7 | length 780.7
  Top Layer w10: U400.7 1301.02,1150.76 1301.02,1124.67 1304.97,1120.72 1373.81,1120.72 R403.1 1451.84,1156.37 1562.47,1156.37 D401.2 ; U300.15 1734.84,2502.56 1723.47,2513.93 1723.47,2701.35 1730.5,2708.38 1790,2708.38
VBATT: C400.2 C405.2 R10.2 R400.2 R401.2 R402.2 R403.2 R404.2 R405.2 U400.10 U400.11 U401.1 U401.3 | length 1524.4
  Top Layer w10: R405.2 1227.75,1060 1227.75,1036.9 1250.36,1014.28 1318.81,1014.28 R404.2 1390.47,1045 R403.2 1420.47,1015 1659.53,1015 R402.2 R400.2 1735,1044.65 1765.72,1075.36 1765.72,1119.28 1627.76,1257.24 U401.3 ; C400.2 1565,1410.47 R10.2
  Top Layer w20: 1345,1210 1400.12,1210 C405.2 1420,1234.53 R401.2 1516.93,1307.6 U401.3 1655.18,1307.6 1671.35,1323.76 1671.35,1368.65 1655.31,1384.69 C400.2
VBUS: C403.2 J1.1 U400.13 | length 653.4
  Top Layer w10: C403.2@1175.12,1400 C403.2@1189.88,1400 ; C403.2@1190.8,1369.2 C403.2@1190.8,1400 ; U400.13@1318.35,1269.24 U400.13
  Top Layer w20: C403.2@1189.88,1400 1190.8,1400 1190.8,1618.81 1291.32,1719.34 1340.4,1719.34 J1.1 ; C403.2@1190.8,1369.2 1235,1325 1295,1325 1323.35,1296.65 U400.13@1323.35,1269.24
VDD: L100.2 L200.2 L300.2 P1.2 P2.2 P3.2 R1.1 R6.1 R7.1 R100.2 R200.2 R300.2 R301.2 R406.2 U401.6 | length 2473
  Top Layer w10: L300.2 1475,1870 1515,1830 1670,1830 ; R301.2@1495,1557.03 R301.2 1495,1490 1540,1445 1659.65,1445 U401.6 ; P2.2 1670,1830 ; R6.1 1891.53,1971.06 1891.53,1792.8 1867.2,1768.47 1691.53,1768.47 1670,1790 1670,1830 ; R100.2 R1.1 2147,1008.47 2458.47,1008.47 P1.2 ; P3.2 3391.53,2088.47 3391.53,1782 R7.1
  Top Layer w20: U401.6 1744.37,1404.53 R406.2
pads on no net: E100.2 J1.MH1 J1.MH2 U400.15 Y100.3 Y100.4 Y101.3 Y101.4 Y200.3 Y200.4 Y201.3 Y201.4 Y300.3 Y300.4 Y301.3 Y301.4
copper on no net: | length 33.7
  Top Layer w10: 2802.8,2502.8 2802.8,2472.2 v1(2805,2470)

## Polygon pours and split planes (outlines as drawn)
GND on Bottom Layer "Bottom Layer-No Net" (solid, remove dead copper, pour order 2): 1015,1010 3020,1010 3025,1015 3025,1605 3390,1605 3390,2475 2745,2475 2750,2480 2750,2725 1270,2725 1270,2060 1015,2060 1015,1010

## Silkscreen, mask and mechanical layers (free items; w line width, h text height)
Mechanical 1:
  lines w10: 990,1000 3395,1000 ; 1000,1000 1000,2745 3405,2745 3405,1010

## Text inside footprints (layer, text, board x,y; h text height)
J1: Mechanical 1 "PCB Edge" at 1017.98,1818.91 h9.84 r270
P1: Top Overlay "6" at 2240,1070 h50 r180; Top Overlay "5" at 2240,1170 h50 r180; Top Overlay "2" at 2600,1070 h50 r180; Top Overlay "1" at 2580,1170 h50 r180
P2: Top Overlay "6" at 2010,1890 h50; Top Overlay "5" at 2010,1790 h50; Top Overlay "2" at 1650,1890 h50; Top Overlay "1" at 1670,1790 h50
P3: Top Overlay "6" at 3330,1870 h50 r270; Top Overlay "5" at 3230,1870 h50 r270; Top Overlay "2" at 3330,2230 h50 r270; Top Overlay "1" at 3230,2210 h50 r270